# Altium PCB koruza-hs-flex-PCB.PcbDoc
Units mm, origin at the board's own origin, x right, y up, seen from the top; angles counter-clockwise.
Board outline 42.6 x 151.8 mm, 2 copper layers (Top Layer, Bottom Layer), stack 0.135 mm thick; 7 components, 23 nets, 87 pads, 668 vias.
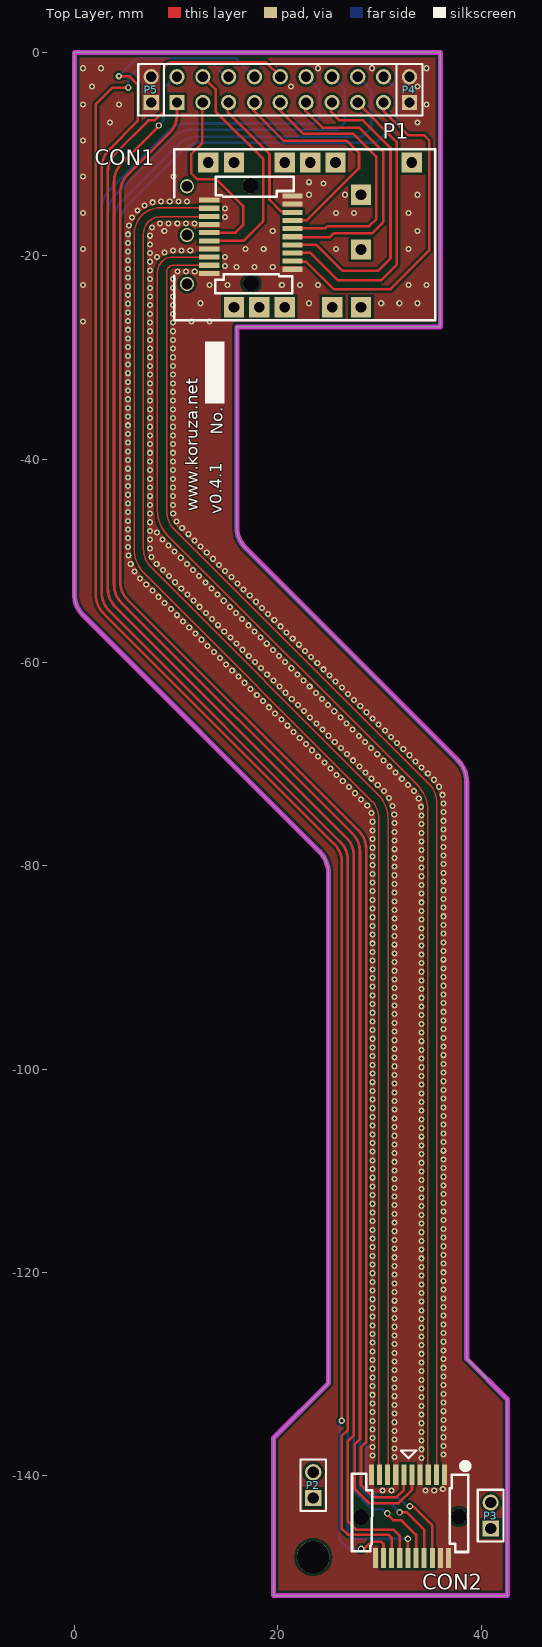
[diagram p0: Top Layer view]
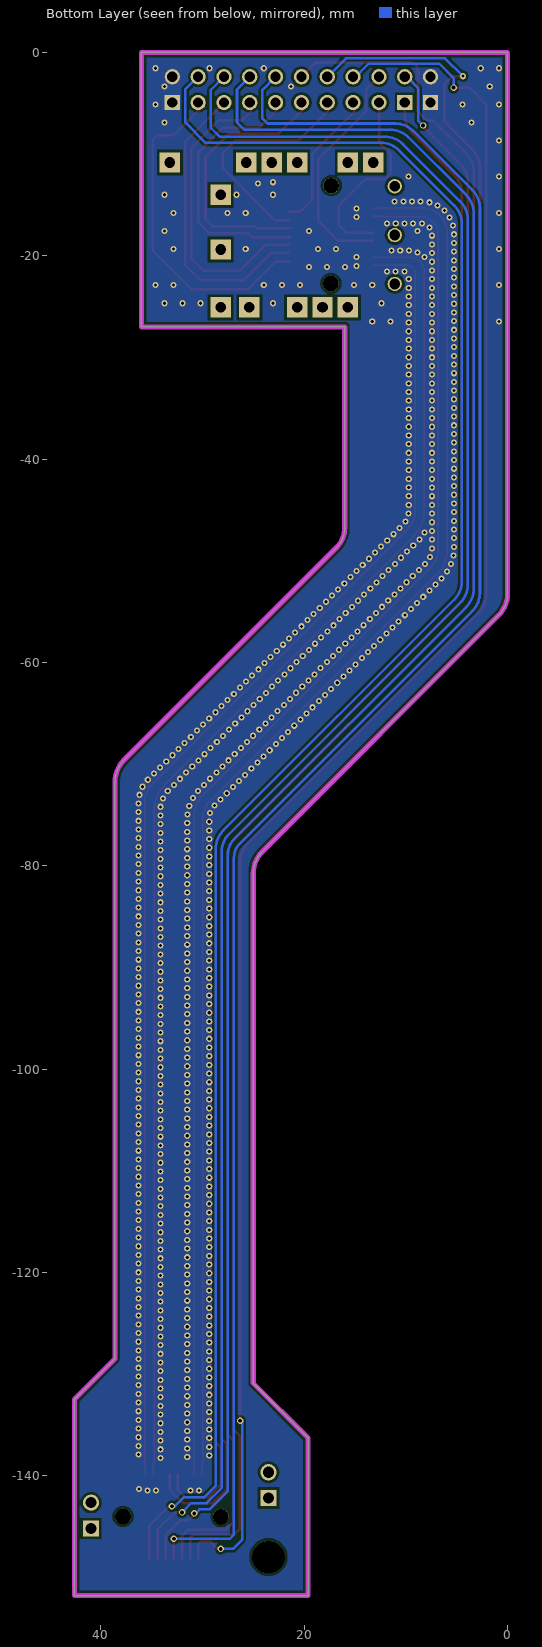
[diagram p1: Bottom Layer view, seen from below]

## Layer stack, top to bottom
Top Layer: signal copper 0.035
Glue + PI + Glue: core 0.065, FR-4, Dk 3.2
Bottom Layer: signal copper 0.035

## Board outline
0.85,-55.35 cw(c2.902,-53.298) 0,-53.298 0,0 36,0 36,-27 16,-27 16,-46.765 ccw(c18.739,-46.765) 16.802,-48.702 23.15,-55.05 37.702,-69.602 cw(c35.534,-71.77) 38.6,-71.77 38.6,-128.5 42.6,-132.5 42.6,-151.8 19.6,-151.8 19.6,-136.3 25,-130.9 25,-80.77 ccw(c21.934,-80.77) 24.102,-78.602

## Design rules (kind name [scope] priority, off if disabled: settings)
Clearance Clearance_1 [InNamedPolygon('GND_B')] p1: gap=0.255 ignorepadtopadclearanceinfootprint=FALSE except(0: Arc-Hole Track-Hole SMDPad-Hole THPad-Hole Via-Hole Fill-Hole Poly-Hole Region-Hole Text-Hole)
Clearance Clearance_nets_poligon [InNamedPolygon('GND_T') vs not InNet('GND')] p2: gap=0.255 ignorepadtopadclearanceinfootprint=FALSE except(0: Arc-Hole Track-Hole SMDPad-Hole THPad-Hole Via-Hole Fill-Hole Poly-Hole Region-Hole Text-Hole)
Clearance Clearance_diff_gnd [(InDifferentialPairClass('All Differential Pairs')) and not (InPadClass('All Pads')) vs InNet('GND')] p3: gap=0.165 ignorepadtopadclearanceinfootprint=FALSE except(0: Arc-Hole Track-Hole SMDPad-Hole THPad-Hole Via-Hole Fill-Hole Poly-Hole Region-Hole Text-Hole)
Clearance [All] p4: gap=0.102 ignorepadtopadclearanceinfootprint=FALSE except(0: Arc-Hole Track-Hole SMDPad-Hole THPad-Hole Via-Hole Fill-Hole Poly-Hole Region-Hole Text-Hole)
ComponentClearance ComponentClearance_header [InComponent('P1')] p1: gap=0 collisioncheckmode=3 verticalgap=0 showdistances=FALSE
ComponentClearance [All] p2: gap=0.254 collisioncheckmode=3 verticalgap=0.254 showdistances=FALSE
DiffPairsRouting [All] p1: maxlimit=0.777 minlimit=0.777 mostfreqgap=0.777 toplayer_mingap=0.777 toplayer_minwidth=0.111 toplayer_maxwidth=0.124 toplayer_prefwidth=0.124 bottomlayer_maxgap=0.777 bottomlayer_prefgap=0.777 bottomlayer_minwidth=0.111 bottomlayer_maxwidth=0.124 bottomlayer_prefwidth=0.124 maxuncoupledlength=12.7
HoleSize [All] p1: absolutevalues=TRUE maxlimit=5.08 minlimit=0.025 maxpercent=80.000 minpercent=20.000
PolygonConnect [All] p1: connectstyle=Direct reliefconductorwidth=0.254 reliefentries=4 polygonreliefangle="90 Angle" airgapwidth=0.254
RoutingVias [All] p1: holewidth=0.711 width=1.27 viastyle="Through Hole" minholewidth=0.254 minwidth=0.508 maxholewidth=0.711 maxwidth=1.27
SolderMaskExpansion [All] p1: expansion=0.102
Width [All] p1: maxlimit=1.016 minlimit=0.102 preferedwidth=0.254 minimp=50.000000 maximp=50.000000 favimp=50.000000
27 further rules are at their usual default settings.

## Classes and differential pairs
differential pair TX1/RX2: +TX1/RX2_P -TX1/RX2_N
differential pair RX1/TX2: +RX1/TX2_P -RX1/TX2_N

## Components (designator, comment, footprint, x,y, rotation, side; value= is the part's Value field where it differs from the comment)
CON1 "SFP" PCB_SFP_COVER 21.467,-21.34 r0 top
CON2 "SFP" SFP 33,-144 r180 top locked
P1 "Header 9X2A" HDR2X9_CEN 10.1,-4.94 r0 top locked
P2 "Header 2" HDR1X2#1 23.5,-142.2 r90 top locked
P3 "Header 2" HDR1X2#1 40.95,-145.19 r90 top
P4 "Header 2" HDR1X2#2 32.96,-4.94 r90 top locked
P5 "Header 2" HDR1X2#2 7.56,-4.94 r90 top locked

## Footprints (in the part's own frame and the unit in brackets; to place one, negate y for a bottom-side part, rotate by r counter-clockwise, add the part's x,y. Pads: shape width x height; smd on the part's side, far side on the other; paste and mask are expansions set on the pad)
HDR1X2#1 [mm]
  rect 1.6x1.6 hole 1.1: 1(0,0)
  round 1.6 hole 1.1: 2(2.54,0)
  silkscreen extent -1.27,-1.27 3.81,1.27
HDR1X2#2 [mm]
  rect 1.5x1.5 hole 1: 1(0,0)
  round 1.5 hole 1: 2(2.54,0)
  silkscreen extent -1.27,-1.27 3.81,1.27
HDR2X9_CEN [mm] "Connector; Header; 9x2 Position"
  rect 1.5x1.5 hole 1: 1(0,0)
  round 1.5 hole 1: 2(2.54,0) 3(5.08,0) 4(7.62,0) 5(10.16,0) 6(12.7,0) 7(15.24,0) 8(17.78,0) 9(20.32,0) 10(0,2.54) 11(2.54,2.54) 12(5.08,2.54) 13(7.62,2.54) 14(10.16,2.54) 15(12.7,2.54) 16(15.24,2.54) 17(17.78,2.54) 18(20.32,2.54)
  silkscreen extent -1.27,-1.27 21.59,3.81
PCB_SFP_COVER [mm]
  rect 2x0.5 smd: 1(0,0) 2(0,0.8) 3(0,1.6) 4(0,2.4) 5(0,3.2) 6(0,4) 7(0,4.8) 8(0,5.6) 9(0,6.4) 10(0,7.2) 11(-8.2,6.8) 12(-8.2,6) 13(-8.2,5.2) 14(-8.2,4.4) 15(-8.2,3.6) 16(-8.2,2.8) 17(-8.2,2) 18(-8.2,1.2) 19(-8.2,0.4) 20(-8.2,-0.4)
  round 1.4 hole 1.067: 21(-10.387,-1.439) 21(-10.387,3.361) 21(-10.387,8.163)
  rect 2x2 hole 1.05: 21(-8.279,10.499) 21(-5.764,-3.75) 21(-5.764,10.499) 21(-3.275,-3.75) 21(-0.786,-3.75) 21(-0.786,10.499) 21(1.729,10.499) 21(3.913,-3.75) 21(4.229,10.499) 21(6.733,-3.75) 21(6.733,1.94) 21(6.733,7.324) 21(11.736,10.499)
  round 1.55 hole 1.55: 35(-4.15,8.225) 36(-4.1,-1.4)
  silkscreen extent -11.66,-4.99 14.03,11.81, body extent -10.67,-4.49 38.13,11.35, height 10.67
SFP [mm] "SFP connector without cage"
  rect 0.5x2 smd: 1(-3.412,-4.1) 2(-2.612,-4.1) 3(-1.812,-4.1) 4(-1.012,-4.1) 5(-0.212,-4.1) 6(0.588,-4.1) 7(1.388,-4.1) 8(2.188,-4.1) 9(2.988,-4.1) 10(3.788,-4.1) 11(3.388,4.1) 12(2.588,4.1) 13(1.788,4.1) 14(0.988,4.1) 15(0.188,4.1) 16(-0.612,4.1) 17(-1.412,4.1) 18(-2.212,4.1) 19(-3.012,4.1) 20(-3.812,4.1)
  round 1.55 hole 1.55: 35(4.813,0.05) 36(-4.812,0)
  silkscreen extent -5.76,-6.48 5.69,3.5, body extent -5.49,-4.54 5.51,4.61, height 5.28

## Part data
CON1: library part "SFP connector", "SFP with cage"
CON2: library part "SFP connector reverse", "SFP, woutout cage, reverse orientation of SFP module"
P1: "Header, 9-Pin, Dual row"
P2 P3 P4 P5: "Header, 2-Pin"

## Free pads (board coordinates)
  round 3.2 hole 3.2 unplated: 1(23.5,-148)

## Via types
v1: diameter 0.6, hole 0.3, Top Layer to Bottom Layer, tented both sides, 660 vias
v2: diameter 0.635, hole 0.381, Top Layer to Bottom Layer, tented both sides, 8 vias

## Nets (pads, with @x,y where several pads share a name; then routed paths per layer and width w, separated by ;. In a path a pad name is that pad's centre, name@x,y a point inside that pad or via, vN(x,y) a via of type N, cw(c..) or ccw(c..) an arc to the next point about the centre after c; other vN are vias at no path point)
GND: CON1.1 CON1.9 CON1.10 CON1.11 CON1.14 CON1.17 CON1.20 CON2.1 CON2.4 CON2.7 CON2.10 CON2.11 CON2.19 CON2.20 P4.1 P4.2 P5.1 P5.2
  other v1: 34.546,-141.462 35.4,-141.465 30.33,-141.451 31.184,-141.441 36.241,-141.313 34.13,-138.256 31.495,-138.159 29.33,-138.018 36.295,-137.925 34.13,-137.402 31.495,-137.305 29.33,-137.164 36.295,-137.071 34.13,-136.548 31.495,-136.451 29.33,-136.31 36.295,-136.217 34.13,-135.694 31.495,-135.597 29.33,-135.456 36.295,-135.363 34.13,-134.84 31.495,-134.743 29.33,-134.602 36.295,-134.509 34.13,-133.986 31.495,-133.889 29.33,-133.748 36.295,-133.655 34.13,-133.132 31.495,-133.035 29.33,-132.894 36.295,-132.801 34.13,-132.278 31.495,-132.181 29.33,-132.04 36.295,-131.947 34.13,-131.424 31.495,-131.327 29.33,-131.186 36.295,-131.093 34.13,-130.57 31.495,-130.473 29.33,-130.332 36.295,-130.239 34.13,-129.716 31.495,-129.619 29.33,-129.478 36.295,-129.385 34.13,-128.862 31.495,-128.765 29.33,-128.624 36.295,-128.531 34.13,-128.008 31.495,-127.911 29.33,-127.77 36.295,-127.677 34.13,-127.154 31.495,-127.057 29.33,-126.916 36.295,-126.823 34.13,-126.3 31.495,-126.203 29.33,-126.062 36.295,-125.969 34.13,-125.446 31.495,-125.349 29.33,-125.208 36.295,-125.115 34.13,-124.592 31.495,-124.495 29.33,-124.354 36.295,-124.261 34.13,-123.738 31.495,-123.641 29.33,-123.5 36.295,-123.407 34.13,-122.884 31.495,-122.787 29.33,-122.646 36.295,-122.553 34.13,-122.03 31.495,-121.933 29.33,-121.792 36.295,-121.699 34.13,-121.176 31.495,-121.079 29.33,-120.938 36.295,-120.845 34.13,-120.322 31.495,-120.225 29.33,-120.084 36.295,-119.991 34.13,-119.468 31.495,-119.371 29.33,-119.23 36.295,-119.137 34.13,-118.614 31.495,-118.517 29.33,-118.376 36.295,-118.283 34.13,-117.76 31.495,-117.663 29.33,-117.522 36.295,-117.429 34.13,-116.906 31.495,-116.809 29.33,-116.668 36.295,-116.575 34.13,-116.052 31.495,-115.955 29.33,-115.814 36.295,-115.721 34.13,-115.198 31.495,-115.101 29.33,-114.96 36.295,-114.867 34.13,-114.344 31.495,-114.247 29.33,-114.106 36.295,-114.013 34.13,-113.49 31.495,-113.393 29.33,-113.252 36.295,-113.159 34.13,-112.636 31.495,-112.539 29.33,-112.398 36.295,-112.305 34.13,-111.782 31.495,-111.685 29.33,-111.544 36.295,-111.451 34.13,-110.928 31.495,-110.831 29.33,-110.69 36.295,-110.597 34.13,-110.074 31.495,-109.977 29.33,-109.836 36.295,-109.743 34.13,-109.22 31.495,-109.123 29.33,-108.982 36.295,-108.889 34.13,-108.366 31.495,-108.269 29.33,-108.128 36.295,-108.035 34.13,-107.512 31.495,-107.415 29.33,-107.274 36.295,-107.181 34.13,-106.658 31.495,-106.561 29.33,-106.42 36.295,-106.327 34.13,-105.804 31.495,-105.707 29.33,-105.566 36.295,-105.473 34.13,-104.95 31.495,-104.853 29.33,-104.712 36.295,-104.619 34.13,-104.096 31.495,-103.999 29.33,-103.858 36.295,-103.765 34.13,-103.242 31.495,-103.145 29.33,-103.004 36.295,-102.911 34.13,-102.388 31.495,-102.291 29.33,-102.15 36.295,-102.057 34.13,-101.534 31.495,-101.437 29.33,-101.296 36.295,-101.203 34.13,-100.68 31.495,-100.583 29.33,-100.442 36.295,-100.349 34.13,-99.826 31.495,-99.729 29.33,-99.588 36.295,-99.495 34.13,-98.972 31.495,-98.875 29.33,-98.734 36.295,-98.641 34.13,-98.118 31.495,-98.021 29.33,-97.88 36.295,-97.787 34.13,-97.264 31.495,-97.167 29.33,-97.026 36.295,-96.933 34.13,-96.41 31.495,-96.313 29.33,-96.172 36.295,-96.079 34.13,-95.556 31.495,-95.459 29.33,-95.318 36.295,-95.225 34.13,-94.702 31.495,-94.605 29.33,-94.464 36.295,-94.371 34.13,-93.848 31.495,-93.751 29.33,-93.61 36.295,-93.517 34.13,-92.994 31.495,-92.897 29.33,-92.756 36.295,-92.663 34.13,-92.14 31.495,-92.043 29.33,-91.902 36.295,-91.809 34.13,-91.286 31.495,-91.189 29.33,-91.048 36.295,-90.955 34.13,-90.432 31.495,-90.335 29.33,-90.194 36.295,-90.101 34.13,-89.578 31.495,-89.481 29.33,-89.34 36.295,-89.247 34.13,-88.724 31.495,-88.627 29.33,-88.486 36.295,-88.393 34.13,-87.87 31.495,-87.773 29.33,-87.632 36.295,-87.539 34.13,-87.016 31.495,-86.919 29.33,-86.778 36.295,-86.685 34.13,-86.162 31.495,-86.065 29.33,-85.924 36.295,-85.831 34.13,-85.308 31.495,-85.211 29.33,-85.07 36.295,-84.977 34.13,-84.454 31.495,-84.357 29.33,-84.216 36.295,-84.123 34.13,-83.6 31.495,-83.503 29.33,-83.362 36.295,-83.269 34.13,-82.746 31.495,-82.649 29.33,-82.508 36.295,-82.415 34.13,-81.892 31.495,-81.795 29.33,-81.654 36.295,-81.561 34.13,-81.038 31.495,-80.941 29.33,-80.8 36.295,-80.707 34.13,-80.184 31.495,-80.087 29.33,-79.946 36.295,-79.853 34.13,-79.33 31.495,-79.233 29.33,-79.092 36.295,-78.999 34.13,-78.476 31.495,-78.379 29.33,-78.238 36.295,-78.145 34.13,-77.622 31.495,-77.525 29.33,-77.384 36.295,-77.291 34.13,-76.768 31.495,-76.671 29.33,-76.53 36.295,-76.437 34.13,-75.914 31.495,-75.817 29.33,-75.676 36.295,-75.583 34.13,-75.06 31.469,-74.964 29.238,-74.827 36.295,-74.729 34.105,-74.206 31.294,-74.128 28.813,-74.087 36.295,-73.875 28.212,-73.48 33.876,-73.383 30.943,-73.349 36.2,-73.027 27.608,-72.876 30.44,-72.659 33.41,-72.668 27.005,-72.272 35.882,-72.234 29.842,-72.049 32.814,-72.056 26.401,-71.668 35.375,-71.547 29.239,-71.445 32.21,-71.452 25.797,-71.064 34.766,-70.948 31.606,-70.849 28.635,-70.841 25.193,-70.46 34.162,-70.344 28.031,-70.237 31.002,-70.245 24.589,-69.856 33.559,-69.74 27.427,-69.633 30.398,-69.641 23.985,-69.252 32.955,-69.136 26.823,-69.03 29.795,-69.037 23.381,-68.649 32.351,-68.532 29.191,-68.433 26.219,-68.426 22.777,-68.045 31.747,-67.928 25.615,-67.822 28.587,-67.829 22.174,-67.441 31.143,-67.325 25.011,-67.218 27.983,-67.225 21.57,-66.837 30.539,-66.721 24.408,-66.614 27.379,-66.621 20.966,-66.233 29.935,-66.117 26.775,-66.018 23.804,-66.01 20.362,-65.629 29.331,-65.513 26.171,-65.414 23.2,-65.406 19.758,-65.025 28.728,-64.909 22.596,-64.802 25.568,-64.81 19.154,-64.422 28.124,-64.305 21.992,-64.199 24.964,-64.206 18.55,-63.818 27.52,-63.701 21.388,-63.595 24.36,-63.602 17.947,-63.214 26.916,-63.098 23.756,-62.998 20.784,-62.991 17.343,-62.61 26.312,-62.494 20.181,-62.387 23.152,-62.394 16.739,-62.006 25.708,-61.89 19.577,-61.783 22.548,-61.79 16.135,-61.402 25.104,-61.286 18.973,-61.179 21.944,-61.187 15.531,-60.798 24.501,-60.682 21.34,-60.583 18.369,-60.575 14.927,-60.194 23.897,-60.078 20.737,-59.979 17.765,-59.972 14.323,-59.591 23.293,-59.474 17.161,-59.368 20.133,-59.375 13.719,-58.987 22.689,-58.87 16.557,-58.764 19.529,-58.771 13.116,-58.383 22.085,-58.267 15.953,-58.16 18.925,-58.167 12.512,-57.779 21.481,-57.663 18.321,-57.563 15.35,-57.556 11.908,-57.175 20.877,-57.059 14.746,-56.952 17.717,-56.96 11.304,-56.571 20.273,-56.455 14.142,-56.348 17.113,-56.356 10.7,-55.967 19.67,-55.851 13.538,-55.744 16.51,-55.752 10.096,-55.364 19.066,-55.247 15.906,-55.148 12.934,-55.141 9.492,-54.76 18.462,-54.643 12.33,-54.537 15.302,-54.544 8.888,-54.156 17.858,-54.039 11.726,-53.933 14.698,-53.94 8.285,-53.552 17.254,-53.436 11.122,-53.329 14.094,-53.336 7.681,-52.948 16.65,-52.832 10.519,-52.725 13.49,-52.732 7.077,-52.344 16.046,-52.228 12.886,-52.129 9.915,-52.121 6.472,-51.742 15.443,-51.624 9.311,-51.517 12.282,-51.525 5.936,-51.077 14.839,-51.02 8.707,-50.913 11.679,-50.921 14.235,-50.416 5.546,-50.317 8.103,-50.31 11.075,-50.317 13.631,-49.812 10.471,-49.713 7.598,-49.621 5.319,-49.494 13.027,-49.209 9.867,-49.109 7.432,-48.783 5.268,-48.641 12.423,-48.605 9.263,-48.505 11.819,-48.001 7.432,-47.929 8.66,-47.901 5.268,-47.787 11.215,-47.397 8.145,-47.22 7.432,-47.075 5.268,-46.933 10.612,-46.793 7.432,-46.221 10.032,-46.165 5.268,-46.079 7.432,-45.367 9.732,-45.366 5.268,-45.225 7.432,-44.513 9.707,-44.513 5.268,-44.371 7.432,-43.659 9.707,-43.659 5.268,-43.517 7.432,-42.805 9.707,-42.805 5.268,-42.663 7.432,-41.951 9.707,-41.951 5.268,-41.809 7.432,-41.097 9.707,-41.097 5.268,-40.955 7.432,-40.243 9.707,-40.243 5.268,-40.101 7.432,-39.389 9.707,-39.389 5.268,-39.247 7.432,-38.535 9.707,-38.535 5.268,-38.393 7.432,-37.681 9.707,-37.681 5.268,-37.539 7.432,-36.827 9.707,-36.827 5.268,-36.685 7.432,-35.973 9.707,-35.973 5.268,-35.831 7.432,-35.119 9.707,-35.119 5.268,-34.977 7.432,-34.265 9.707,-34.265 5.268,-34.123 7.432,-33.411 9.707,-33.411 5.268,-33.269 7.432,-32.557 9.707,-32.557 5.268,-32.415 7.432,-31.703 9.707,-31.703 5.268,-31.561 7.432,-30.849 9.707,-30.849 5.268,-30.707 7.432,-29.995 9.707,-29.995 5.268,-29.853 7.432,-29.141 9.707,-29.141 5.268,-28.999 7.432,-28.287 9.707,-28.287 5.268,-28.145 7.432,-27.433 9.707,-27.433 5.268,-27.291 7.432,-26.579 9.707,-26.579 0.849,-26.457 11.517,-26.457 13.295,-26.457 5.268,-26.437 7.432,-25.725 9.707,-25.725 5.268,-25.583 7.432,-24.871 9.707,-24.871 5.268,-24.729 12.406,-24.679 23.074,-24.679 30.186,-24.679 31.964,-24.679 33.742,-24.679 7.432,-24.017 9.707,-24.017 5.268,-23.875 7.432,-23.163 9.707,-23.163 5.268,-23.021 0.849,-22.901 13.295,-22.901 15.073,-22.901 20.407,-22.901 22.185,-22.901 23.963,-22.901 32.853,-22.901 34.631,-22.901 7.432,-22.309 9.707,-22.309 5.268,-22.167 10.138,-21.571 10.992,-21.571 11.846,-21.571 7.432,-21.455 5.268,-21.313 15.962,-21.123 17.74,-21.123 19.518,-21.123 14.832,-21.001 7.432,-20.601 5.268,-20.459 8.146,-20.149 14.832,-20.147 7.432,-19.747 8.855,-19.673 5.268,-19.605 9.693,-19.508 10.547,-19.508 11.401,-19.508 0.849,-19.345 16.851,-19.345 18.629,-19.345 25.741,-19.345 32.853,-19.345 7.432,-18.893 5.268,-18.751 7.432,-18.039 5.268,-17.897 8.85,-17.567 19.518,-17.567 33.742,-17.567 7.66,-17.216 5.367,-17.049 8.42,-16.828 9.274,-16.822 10.128,-16.822 10.982,-16.822 11.836,-16.822 5.689,-16.258 14.832,-16.201 0.849,-15.789 25.741,-15.789 27.519,-15.789 32.853,-15.789 6.205,-15.578 14.832,-15.347 6.889,-15.067 7.682,-14.75 8.531,-14.657 9.385,-14.657 10.239,-14.657 11.093,-14.657 23.074,-14.011 26.63,-14.011 33.742,-14.011 24.525,-12.9 23.075,-12.775 0.849,-12.233 9.739,-12.233 0.849,-8.677 3.516,-6.899 33.742,-6.899 0.849,-5.121 4.405,-5.121 34.631,-5.121 1.738,-3.343 21.296,-3.343 33.742,-3.343 0.849,-1.565 2.627,-1.565 23.963,-1.565 29.297,-1.565 34.631,-1.565
LOS_1: CON1.8 P1.3 | length 13.9
  Top Layer w0.254: P1.3@15.08,-5.1 15.08,-5.88 19.2,-10 19.2,-14.5 20.4,-15.7 CON1.8@21.5,-15.7
LOS_2: CON2.18 P1.18 | length 182.1
  Top Layer w0.254: v2(33,-143) 33.3,-143 35.212,-144.912 CON2.18
  Bottom Layer w0.254: P1.18@30.32,-2.56 ccw(c30.36,-2.56) P1.18@30.36,-2.6 ; P1.18 31.7,-3.68 31.7,-6.875 29.675,-8.9 12.452,-8.9 ccw(c12.452,-11.44) 10.656,-9.644 5.244,-15.056 ccw(c7.04,-16.852) 4.5,-16.852 4.5,-52.048 ccw(c7.04,-52.048) 5.244,-53.844 27.956,-76.556 cw(c26.16,-78.352) 28.7,-78.352 28.7,-141 29.8,-142.1 31.8,-142.1 32.7,-143 v2(33,-143)
MOD_DEF_0_1: CON1.6 P1.5 | length 26.9
  Top Layer w0.254: P1.5@20.16,-5.1 20.16,-5.66 22.5,-8 27.4,-8 29.7,-10.3 29.7,-16.4 29,-17.1 24.9,-17.1 24.7,-17.3 CON1.6@21.3,-17.3
MOD_DEF_0_2: CON2.16 P1.16 | length 178.1
  Top Layer w0.254: v2(30.8,-143.7) 30.8,-143.8 31.4,-144.4 32.2,-144.4 33.612,-145.812 CON2.16
  Bottom Layer w0.254: P1.16 26.6,-3.66 26.6,-6.9 25.9,-7.6 11.552,-7.6 ccw(c11.552,-10.14) 9.756,-8.344 4.044,-14.056 ccw(c5.84,-15.852) 3.3,-15.852 3.3,-52.748 ccw(c5.84,-52.748) 4.044,-54.544 26.878,-77.378 cw(c25.375,-78.88) 27.5,-78.88 27.5,-141.5 29.3,-143.3 30.3,-143.3 30.7,-143.7 v2(30.8,-143.7)
MOD_DEF_1_1: CON1.5 P1.6 | length 26.6
  Top Layer w0.254: CON1.5@21.4,-18.1 21.5,-18.2 25.1,-18.2 25.5,-17.8 29.3,-17.8 30.4,-16.7 30.4,-9.8 28,-7.4 24.4,-7.4 22.7,-5.7 P1.6@22.7,-5.1
MOD_DEF_1_2: CON2.15 P1.15 | length 178.4
  Top Layer w0.254: CON2.15 v2(32.812,-146.2)
  Bottom Layer w0.254: P1.15 24.1,-3.7 24.1,-6.5 23.6,-7 11.052,-7 ccw(c11.052,-9.54) 9.256,-7.744 3.444,-13.556 ccw(c5.24,-15.352) 2.7,-15.352 2.7,-53.148 ccw(c5.24,-53.148) 3.444,-54.944 26.348,-77.848 cw(c25.016,-79.18) 26.9,-79.18 26.9,-145.8 27.3,-146.2 v2(32.812,-146.2)
MOD_DEF_2_1: CON1.4 P1.7 | length 30.3
  Top Layer w0.254: CON1.4 23.8,-18.94 26.36,-21.5 29.875,-21.5 31.1,-20.275 31.1,-9.4 28.4,-6.7 26.1,-6.7 25.24,-5.84 P1.7@25.24,-4.94
MOD_DEF_2_2: CON2.14 P1.14 | length 175.7
  Top Layer w0.254: P1.14 18.86,-1 9.6,-1 ccw(c9.6,-1.8) 8.8,-1.8 8.8,-5.8 7.9,-6.7 7.3,-6.7 4.022,-9.978 ccw(c5.766,-11.721) 3.3,-11.721 3.3,-52.748 ccw(c5.84,-52.748) 4.044,-54.544 26.756,-77.256 cw(c24.96,-79.052) 27.5,-79.052 27.5,-136 26.9,-136.6 26.9,-144.5 27.7,-145.3 31.4,-145.3 32.012,-145.912 CON2.14
RATE_SEL_1: CON1.7 P1.4 | length 22.9
  Top Layer w0.254: P1.4@17.62,-5.1 17.62,-5.72 20.6,-8.7 26.8,-8.7 28,-9.9 28,-11.4 22.9,-16.5 CON1.7@21.4,-16.5
RATE_SEL_2: CON2.17 P1.17 | length 180.3
  Top Layer w0.254: v2(32,-143.6) 32.7,-143.6 34.412,-145.312 CON2.17
  Bottom Layer w0.254: P1.17 29.18,-3.7 29.18,-7.42 28.3,-8.3 12.052,-8.3 ccw(c12.052,-10.84) 10.256,-9.044 4.644,-14.656 ccw(c6.44,-16.452) 3.9,-16.452 3.9,-52.348 ccw(c6.44,-52.348) 4.644,-54.144 27.407,-76.907 cw(c25.733,-78.58) 28.1,-78.58 28.1,-141.2 29.6,-142.7 31.1,-142.7 v2(32,-143.6)
RX1/TX2_N: CON1.12 CON2.9 | length 140.6
  Top Layer w0.124: CON1.12 12.256,-15.34 cw(c12.256,-15.289) 12.206,-15.289 8.439,-15.289 ccw(c8.439,-17.829) 5.899,-17.829 5.899,-48.848 ccw(c9.34,-48.848) 6.907,-51.281 29.218,-73.592 cw(c27.422,-75.388) 29.962,-75.388 29.962,-138.788 cw(c29.841,-138.909) 30.012,-138.909 CON2.9
RX1/TX2_P: CON1.13 CON2.8 | length 139.2
  Top Layer w0.124: CON1.13 12.256,-16.14 ccw(c12.256,-16.19) 12.206,-16.19 8.46,-16.19 ccw(c8.46,-17.85) 6.8,-17.85 6.8,-48.848 ccw(c9.34,-48.848) 7.544,-50.644 29.855,-72.955 cw(c27.422,-75.388) 30.863,-75.388 30.863,-138.788 ccw(c30.984,-138.909) 30.812,-138.909 CON2.8
TX1/RX2_N: CON1.19 CON2.2 | length 133.7
  Top Layer w0.124: CON1.19 9.76,-20.94 ccw(c9.76,-21.625) 9.075,-21.625 9.075,-45.098 ccw(c11.615,-45.098) 9.819,-46.894 34.919,-71.994 cw(c33.123,-73.79) 35.663,-73.79 35.663,-138.788 ccw(c35.784,-138.909) 35.612,-138.909 CON2.2
TX1/RX2_P: CON1.18 CON2.3 | length 134.9
  Top Layer w0.124: CON1.18 9.66,-20.14 ccw(c9.66,-21.625) 8.174,-21.625 8.174,-45.098 ccw(c11.615,-45.098) 9.182,-47.531 33.754,-72.103 cw(c31.321,-74.536) 34.762,-74.536 34.762,-138.788 cw(c34.641,-138.909) 34.812,-138.909 CON2.3
TX_DISABLE_1: CON1.3 P1.8 | length 29.5
  Top Layer w0.254: CON1.3@21.5,-19.7 23.2,-19.7 25.9,-22.4 30.2,-22.4 31.7,-20.9 31.7,-8.8 28,-5.1 P1.8@27.78,-5.1
TX_DISABLE_2: CON2.13 P1.13 | length 177.8
  Top Layer w0.254: v1(4.375,-2.35) 5.4,-2.35 6.225,-3.175 6.225,-6.775 3.444,-9.556 ccw(c5.24,-11.352) 2.7,-11.352 2.7,-53.148 ccw(c5.24,-53.148) 3.444,-54.944 26.156,-77.656 cw(c24.36,-79.452) 26.9,-79.452 26.9,-135.5 26.3,-136.1 26.3,-145.2 26.9,-145.8 30.9,-145.8 31.212,-146.112 CON2.13
  Bottom Layer w0.254: v1(4.375,-2.35) 6.125,-0.6 15.9,-0.6 17.62,-2.32 P1.13@17.62,-2.56
TX_FAULT_1: CON1.2 P1.9 | length 33.5
  Top Layer w0.254: CON1.2@21.4,-20.6 22.8,-20.6 25.5,-23.3 31.1,-23.3 34.9,-19.5 34.9,-8.65 34.4,-8.15 32.8,-8.15 30.42,-5.77 P1.9
TX_FAULT_2: CON2.12 P1.12 | length 173.2
  Top Layer w0.254: v2(5.3,-3.475) 3.75,-3.475 2.1,-5.125 2.1,-53.348 ccw(c4.64,-53.348) 2.844,-55.144 25.556,-77.856 cw(c23.76,-79.652) 26.3,-79.652 v2(26.3,-134.6) ; v2(28.2,-147.2) 28.5,-147.2 29.2,-146.5 30.2,-146.5 30.412,-146.712 CON2.12
  Bottom Layer w0.254: v2(5.3,-3.475) 5.3,-2.525 6.7,-1.125 13.645,-1.125 P1.12@15.08,-2.56 ; v2@26.1,-134.6 26.1,-146.3 27,-147.2 v2(28.2,-147.2)
VCCR_1: CON1.15 P1.2 | length 19.2
  Top Layer w0.254: P1.2@12.54,-5.1 12.6,-5.16 12.6,-8.9 11.5,-10 11.5,-11.9 12.1,-12.5 14,-12.5 16.6,-15.1 16.6,-17 15.86,-17.74 CON1.15
VCCR_2: CON2.6 P1.1 | length 154.6
  Top Layer w0.254: P1.1 10.1,-6.148 cw(c7.56,-6.148) 9.356,-7.944 5.244,-12.056 ccw(c7.04,-13.852) 4.5,-13.852 4.5,-52.048 ccw(c7.04,-52.048) 5.244,-53.844 27.956,-76.556 cw(c26.16,-78.352) 28.7,-78.352 28.7,-136.7 28.2,-137.2 28.2,-140.9 29.4,-142.1 31.7,-142.1 32.412,-141.388 CON2.6
VCCT_1: CON1.16 P1.11 | length 22.8
  Top Layer w0.254: P1.11 13.9,-3.66 13.9,-5.8 18.6,-10.5 18.6,-16.6 16.66,-18.54 CON1.16
VCCT_2: CON2.5 P1.10 | length 159.6
  Top Layer w0.254: v2@8.3,-7.3 4.644,-10.956 ccw(c6.44,-12.752) 3.9,-12.752 3.9,-52.348 ccw(c6.44,-52.348) 4.644,-54.144 27.356,-76.856 cw(c25.56,-78.652) 28.1,-78.652 28.1,-136.4 27.6,-136.9 27.6,-141.3 29,-142.7 31.9,-142.7 33.212,-141.388 CON2.5
  Bottom Layer w0.254: v2(8.3,-7.2) 8.775,-6.725 8.775,-3.525 9.9,-2.4 P1.10
pads on no net: CON1.21 CON1.35 CON1.36 CON2.35 CON2.36 P2.1 P2.2 P3.1 P3.2

## Polygon pours and split planes (outlines as drawn)
GND on Bottom Layer "GND_B" (solid, pour order 10): 0.85,-55.35 cw(c2.902,-53.298) 0,-53.298 0,0 36,0 36,-27 16,-27 16,-46.765 ccw(c18.739,-46.765) 16.802,-48.702 23.15,-55.05 37.702,-69.602 cw(c35.534,-71.77) 38.6,-71.77 38.6,-128.5 42.6,-132.5 42.6,-152 19.6,-152 19.6,-136.3 25,-130.9 25,-80.77 ccw(c21.934,-80.77) 24.102,-78.602
GND on Top Layer "GND_T" (solid, remove dead copper, pour order 17): 0.85,-55.35 cw(c2.902,-53.298) 0,-53.298 0,0 36,0 36,-27 16,-27 16,-46.765 ccw(c18.739,-46.765) 16.802,-48.702 23.15,-55.05 37.702,-69.602 cw(c35.534,-71.77) 38.6,-71.77 38.6,-128.5 42.6,-132.5 42.6,-151.8 19.6,-151.8 19.6,-136.3 25,-130.9 25,-80.77 ccw(c21.934,-80.77) 24.102,-78.602

## Keep-outs
Keep-Out Layer:
  lines w0.5: 0,-53.298 ccw(c0,-53.298) 0,-53.298 ; 0,-53.298 ccw(c2.902,-53.298) 0.85,-55.35 24.102,-78.602 cw(c21.934,-80.77) 25,-80.77 25,-92 25,-130.9 19.6,-136.3 19.6,-151.8 42.6,-151.8 42.6,-132.5 38.6,-128.5 38.6,-76.57 38.6,-71.77 ccw(c35.534,-71.77) 37.702,-69.602 23.15,-55.05 ; 0,-53.298 0,-42 0,0 36,0 36,-27 16,-27 16,-42 16,-46.765 ccw(c18.739,-46.765) 16.802,-48.702 23.15,-55.05 ; 23.15,-55.05 23.15,-55.05

## Silkscreen, mask and mechanical layers (free items; w line width, h text height)
Top Overlay:
  rectangle: 12.85,-34.55 14.775,-28.45
  text "No." at 14.575,-37.625 h1.2 r90
  text "www.koruza.net" at 12.15,-45.125 h1.2 r90
  text "v0.4.1" at 14.525,-45.425 h1.2 r90
Mechanical 1:
  circle w0.178: c23.5,-148 r3
  lines w0.025: 84.686,12.062 87.218,14.594 90.266,17.642 93.314,20.69 96.362,23.738 99.41,26.786 ; 84.686,13.586 85.694,14.594 88.742,17.642 91.79,20.69 94.838,23.738 97.886,26.786 ; 84.686,15.11 87.218,17.642 90.266,20.69 93.314,23.738 96.362,26.786 ; 84.686,16.634 85.694,17.642 88.742,20.69 91.79,23.738 94.838,26.786 ; 84.686,18.158 87.218,20.69 90.266,23.738 93.314,26.786 ; 84.686,19.682 85.694,20.69 88.742,23.738 91.79,26.786 ; 84.686,21.206 87.218,23.738 90.266,26.786 ; 84.686,22.73 85.694,23.738 88.742,26.786 ; 84.686,24.254 87.218,26.786 ; 84.686,25.778 85.694,26.786 ; 85.694,11.546 88.742,14.594 91.79,17.642 94.838,20.69 97.886,23.738 100.934,26.786 ; 87.218,11.546 90.266,14.594 93.314,17.642 96.362,20.69 99.41,23.738 102.458,26.786 ; 88.742,11.546 91.79,14.594 94.838,17.642 97.886,20.69 100.934,23.738 103.982,26.786 ; 90.266,11.546 93.314,14.594 96.362,17.642 99.41,20.69 102.458,23.738 105.506,26.786 ; 91.79,11.546 94.838,14.594 97.886,17.642 100.934,20.69 103.982,23.738 107.03,26.786 ; 93.314,11.546 96.362,14.594 99.41,17.642 102.458,20.69 105.506,23.738 108.554,26.786 ; 94.838,11.546 97.886,14.594 100.934,17.642 103.982,20.69 107.03,23.738 110.078,26.786 ; 96.362,11.546 99.41,14.594 102.458,17.642 105.506,20.69 108.554,23.738 111.602,26.786 ; 97.886,11.546 100.934,14.594 103.982,17.642 107.03,20.69 110.078,23.738 113.126,26.786 ; 99.41,11.546 102.458,14.594 105.506,17.642 108.554,20.69 111.602,23.738 113.126,25.262 ; 100.934,11.546 103.982,14.594 107.03,17.642 110.078,20.69 113.126,23.738 ; 102.458,11.546 105.506,14.594 108.554,17.642 111.602,20.69 113.126,22.214 ; 103.982,11.546 107.03,14.594 110.078,17.642 113.126,20.69 ; 105.506,11.546 108.554,14.594 111.602,17.642 113.126,19.166 ; 107.03,11.546 110.078,14.594 113.126,17.642 ; 108.554,11.546 111.602,14.594 113.126,16.118 ; 110.078,11.546 113.126,14.594 ; 111.602,11.546 113.126,13.07
  lines w0.381: 2.411,14.594 12.822,14.594 39.485,14.594 53.705,14.594 70.211,14.594 84.686,14.594 113.126,14.594 ; 2.411,17.642 12.822,17.642 39.485,17.642 53.705,17.642 70.211,17.642 84.686,17.642 113.126,17.642 ; 2.411,20.69 12.822,20.69 39.485,20.69 53.705,20.69 70.211,20.69 84.686,20.69 113.126,20.69 ; 2.411,23.738 12.822,23.738 39.485,23.738 53.705,23.738 70.211,23.738 84.686,23.738 113.126,23.738 ; 2.411,26.786 113.126,26.786 ; 12.822,29.834 12.822,11.546 ; 39.485,29.834 39.485,11.546 ; 53.705,29.834 53.705,11.546 ; 70.211,29.834 70.211,11.546 ; 84.686,29.834 84.686,11.546 ; 12.822,11.546 39.485,11.546 ; 12.822,11.546 2.411,11.546 2.411,29.834 113.126,29.834 113.126,11.546 84.686,11.546 ; 39.485,11.546 53.705,11.546 ; 53.705,11.546 70.211,11.546 ; 70.211,11.546 84.686,11.546
  text "Layer" at 3.935,27.548 h1.52
  text "Name" at 14.346,27.548 h1.52
  text "Material" at 41.009,27.548 h1.52
  text "Thickness" at 55.229,27.548 h1.52
  text "Constant" at 71.735,27.548 h1.52
  text "Board Layer Stack" at 86.21,27.548 h1.52
  text "1" at 3.935,24.5 h1.52
  text "Top Overlay" at 14.346,24.5 h1.52
  text "2" at 3.935,21.452 h1.52
  text "Top Layer" at 14.346,21.452 h1.52
  text "Copper" at 41.009,21.452 h1.52
  text "0.035mm" at 55.229,21.452 h1.52
  text "3" at 3.935,18.404 h1.52
  text "Glue + PI + Glue" at 14.346,18.404 h1.52
  text "FR-4" at 41.009,18.404 h1.52
  text "0.065mm" at 55.229,18.404 h1.52
  text "3.2" at 71.735,18.404 h1.52
  text "4" at 3.935,15.356 h1.52
  text "Bottom Layer" at 14.346,15.356 h1.52
  text "Copper" at 41.009,15.356 h1.52
  text "0.035mm" at 55.229,15.356 h1.52
  text "5" at 3.935,12.308 h1.52
  text "Bottom Overlay" at 14.346,12.308 h1.52
  text "Flex PCB" at 11.95,3.6 h3
Mechanical 16:
  circle w0.178: c45.35,-140.1 r1.6
  circle w0.178: c45.35,-147.8 r1.6
  circle w0.178: c23.5,-148 r1.6
  lines w0.5: 19.6,-136.1 19.6,-151.8 49.6,-151.8 49.6,-136.1 19.6,-136.1 ; 19.6,-136.1 19.6,-136.1 ; 19.6,-136.1 19.6,-136.1

## Dimensions
0,0 to 19.6,-151.8 on Mechanical 1
0,0 to 42.6,-151.8 on Mechanical 1
23.5,-148 to 23.5,-142.2 on Mechanical 1
23.5,-148 to 19.6,-151.8 on Mechanical 1
23.5,-148 to 19.6,-151.8 on Mechanical 1
19.6,-151.8 to 42.6,-151.8 on Mechanical 1
9.81,-26.334 to 0,-42 on Mechanical 1
15.703,-25.09 to 0,-42 on Mechanical 1
16,-27 to 15.703,-25.09 on Mechanical 1
25,-92 to 38.6,-128.5 on Mechanical 1